# Altium PCB R Box - PCB v1.0 20210619.PcbDoc
Units mm, origin at the board's own origin, x right, y up, seen from the top; angles counter-clockwise.
Board outline 165 x 95 mm, 2 copper layers (Top Layer, Bottom Layer), stack 1.571 mm thick; 137 components, 23 nets, 221 pads, 295 vias.
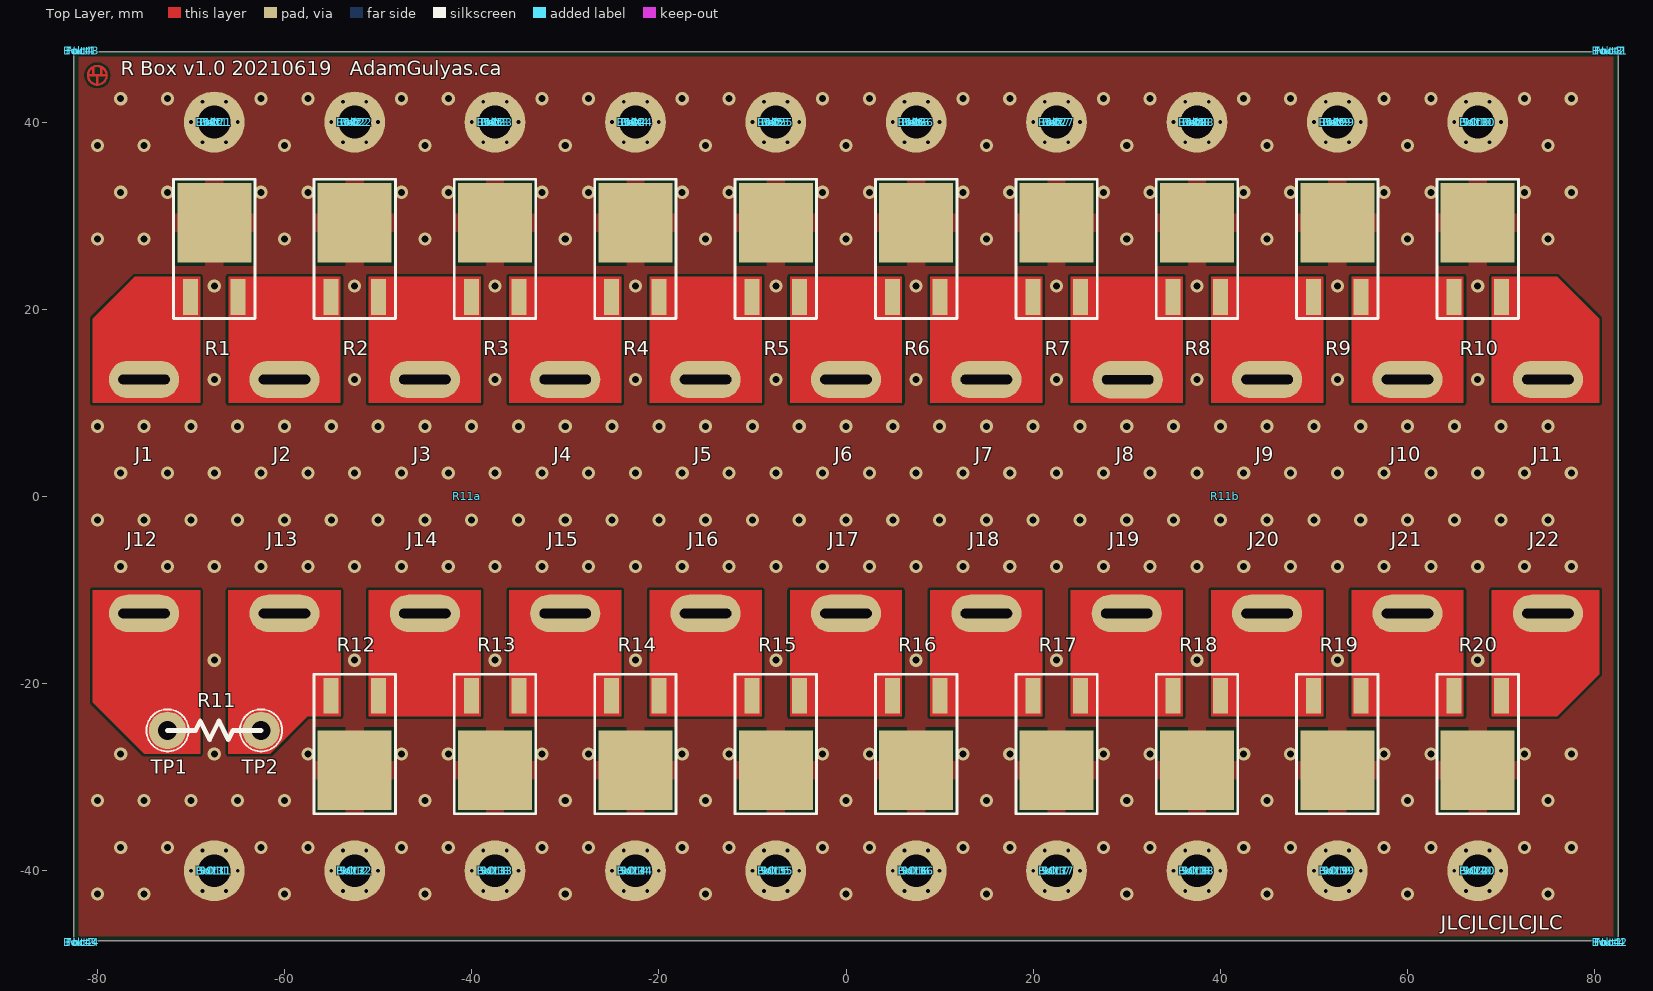
[diagram p0: Top Layer view]
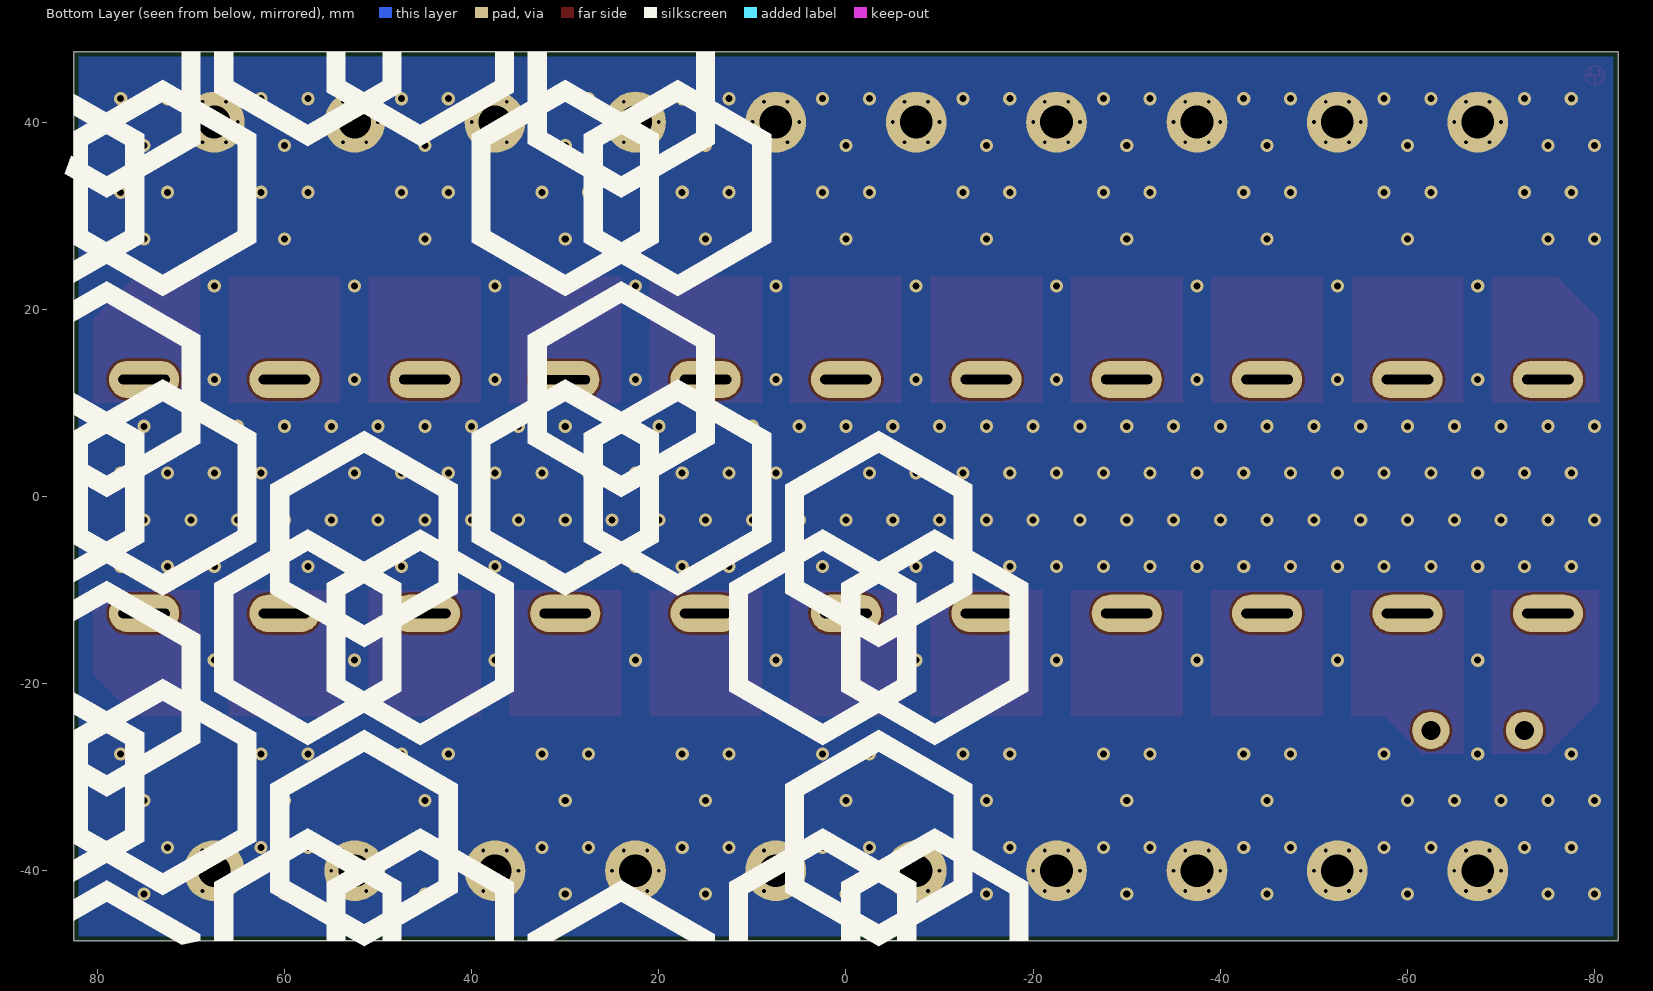
[diagram p1: Bottom Layer view, seen from below]

## Layer stack, top to bottom
Top Solder: solder mask 0.0102, Solder Resist, Dk 3.5
Top Layer: signal copper 0.0356
Dielectric 1: dielectric 1.5, FR-4, Dk 4.8
Bottom Layer: signal copper 0.0356
Bottom Solder: solder mask 0.0102, Solder Resist, Dk 3.5

## Board outline
-82.5,-47.5 -82.5,47.5 82.5,47.5 82.5,-47.5

## Design rules (kind name [scope] priority, off if disabled: settings)
Clearance [All] p1: gap=0.254 ignorepadtopadclearanceinfootprint=FALSE except(0: Arc-Hole Track-Hole SMDPad-Hole THPad-Hole Via-Hole Fill-Hole Poly-Hole Region-Hole Text-Hole)
ComponentClearance [All] p1 off: gap=0.254 collisioncheckmode=3 verticalgap=0.254 showdistances=FALSE
PolygonConnect [All] p1: thpad.connectstyle=Direct thpad.reliefconductorwidth=1 thpad.reliefentries=4 thpad.polygonreliefangle="45 Angle" thpad.airgapwidth=0.254 smdpad.connectstyle=Relief smdpad.reliefconductorwidth=2 smdpad.reliefentries=4 smdpad.polygonreliefangle="90 Angle" smdpad.airgapwidth=0.35 via.connectstyle=Direct via.reliefconductorwidth=1 via.reliefentries=4 via.polygonreliefangle="45 Angle" via.airgapwidth=0.254
RoutingVias [All] p1: holewidth=0.711 width=1.27 viastyle="Through Hole" minholewidth=0.711 minwidth=1.27 maxholewidth=0.711 maxwidth=1.27
SolderMaskExpansion [All] p1: expansion=0.102
Width [All] p1: maxlimit=0.254 minlimit=0.254 preferedwidth=0.254
29 further rules are at their usual default settings.

## Components (designator, comment, footprint, x,y, rotation, side; value= is the part's Value field where it differs from the comment)
Bolt1 "M3 6mm" "MECH - BOLT - M3 - 6MM" -67.5,40 r0 top
Bolt2 "M3 6mm" "MECH - BOLT - M3 - 6MM" -52.5,40 r0 top
Bolt3 "M3 6mm" "MECH - BOLT - M3 - 6MM" -37.5,40 r0 top
Bolt4 "M3 6mm" "MECH - BOLT - M3 - 6MM" -22.5,40 r0 top
Bolt5 "M3 6mm" "MECH - BOLT - M3 - 6MM" -7.5,40 r0 top
Bolt6 "M3 6mm" "MECH - BOLT - M3 - 6MM" 7.5,40 r0 top
Bolt7 "M3 6mm" "MECH - BOLT - M3 - 6MM" 22.5,40 r0 top
Bolt8 "M3 6mm" "MECH - BOLT - M3 - 6MM" 37.5,40 r0 top
Bolt9 "M3 6mm" "MECH - BOLT - M3 - 6MM" 52.5,40 r0 top
Bolt10 "M3 6mm" "MECH - BOLT - M3 - 6MM" 67.5,40 r0 top
Bolt11 "M3 6mm" "MECH - BOLT - M3 - 6MM" -67.5,-40 r0 top
Bolt12 "M3 6mm" "MECH - BOLT - M3 - 6MM" -52.5,-40 r0 top
Bolt13 "M3 6mm" "MECH - BOLT - M3 - 6MM" -37.5,-40 r0 top
Bolt14 "M3 6mm" "MECH - BOLT - M3 - 6MM" -22.5,-40 r0 top
Bolt15 "M3 6mm" "MECH - BOLT - M3 - 6MM" -7.5,-40 r0 top
Bolt16 "M3 6mm" "MECH - BOLT - M3 - 6MM" 7.5,-40 r0 top
Bolt17 "M3 6mm" "MECH - BOLT - M3 - 6MM" 22.5,-40 r0 top
Bolt18 "M3 6mm" "MECH - BOLT - M3 - 6MM" 37.5,-40 r0 top
Bolt19 "M3 6mm" "MECH - BOLT - M3 - 6MM" 52.5,-40 r0 top
Bolt20 "M3 6mm" "MECH - BOLT - M3 - 6MM" 67.5,-40 r90 top
Bolt21 "M3 6mm" "Mech - Bolt - M3 - 6mm - back" -67.5,40 r0 top
Bolt22 "M3 6mm" "Mech - Bolt - M3 - 6mm - back" -52.5,40 r90 top
Bolt23 "M3 6mm" "Mech - Bolt - M3 - 6mm - back" -37.5,40 r90 top
Bolt24 "M3 6mm" "Mech - Bolt - M3 - 6mm - back" -22.5,40 r90 top
Bolt25 "M3 6mm" "Mech - Bolt - M3 - 6mm - back" -7.5,40 r90 top
Bolt26 "M3 6mm" "Mech - Bolt - M3 - 6mm - back" 7.5,40 r90 top
Bolt27 "M3 6mm" "Mech - Bolt - M3 - 6mm - back" 22.5,40 r90 top
Bolt28 "M3 6mm" "Mech - Bolt - M3 - 6mm - back" 37.5,40 r90 top
Bolt29 "M3 6mm" "Mech - Bolt - M3 - 6mm - back" 52.5,40 r90 top
Bolt30 "M3 6mm" "Mech - Bolt - M3 - 6mm - back" 67.5,40 r90 top
Bolt31 "M3 6mm" "Mech - Bolt - M3 - 6mm - back" -67.5,-40 r0 top
Bolt32 "M3 6mm" "Mech - Bolt - M3 - 6mm - back" -52.5,-40 r90 top
Bolt33 "M3 6mm" "Mech - Bolt - M3 - 6mm - back" -37.5,-40 r90 top
Bolt34 "M3 6mm" "Mech - Bolt - M3 - 6mm - back" -22.5,-40 r90 top
Bolt35 "M3 6mm" "Mech - Bolt - M3 - 6mm - back" -7.5,-40 r90 top
Bolt36 "M3 6mm" "Mech - Bolt - M3 - 6mm - back" 7.5,-40 r90 top
Bolt37 "M3 6mm" "Mech - Bolt - M3 - 6mm - back" 22.5,-40 r90 top
Bolt38 "M3 6mm" "Mech - Bolt - M3 - 6mm - back" 37.5,-40 r90 top
Bolt39 "M3 6mm" "Mech - Bolt - M3 - 6mm - back" 52.5,-40 r90 top
Bolt40 "M3 6mm" "Mech - Bolt - M3 - 6mm - back" 67.5,-40 r90 top
Bolt41 "M3 8mm" "MECH - BOLT - M3 - 8MM" 81.65,47.65 r0 top
Bolt42 "M3 8mm" "MECH - BOLT - M3 - 8MM" 81.65,-47.65 r90 top
Bolt43 "M3 8mm" "MECH - BOLT - M3 - 8MM" -81.65,47.65 r90 top
Bolt44 "M3 8mm" "MECH - BOLT - M3 - 8MM" -81.65,-47.65 r90 top
Foot1 "720" "FEET - M3 - PN720" -81.65,47.65 r0 top
Foot2 "720" "FEET - M3 - PN720" 81.65,47.65 r0 top
Foot3 "720" "FEET - M3 - PN720" -81.65,-47.65 r0 top
Foot4 "720" "FEET - M3 - PN720" 81.65,-47.65 r0 top
J1 "Banana" "J - BANANA - 108-09XX SERIES" -75,12.5 r90 top
J2 "Banana" "J - BANANA - 108-09XX SERIES" -60,12.5 r90 top
J3 "Banana" "J - BANANA - 108-09XX SERIES" -45,12.5 r90 top
J4 "Banana" "J - BANANA - 108-09XX SERIES" -30,12.5 r90 top
J5 "Banana" "J - BANANA - 108-09XX SERIES" -15,12.5 r90 top
J6 "Banana" "J - BANANA - 108-09XX SERIES" 0,12.5 r90 top
J7 "Banana" "J - BANANA - 108-09XX SERIES" 15,12.5 r90 top
J8 "Banana" "J - BANANA - 108-09XX SERIES" 30.104,12.475 r90 top
J9 "Banana" "J - BANANA - 108-09XX SERIES" 45,12.5 r90 top
J10 "Banana" "J - BANANA - 108-09XX SERIES" 60,12.5 r90 top
J11 "Banana" "J - BANANA - 108-09XX SERIES" 75,12.5 r90 top
J12 "Banana" "J - BANANA - 108-09XX SERIES" -75,-12.5 r90 top
J13 "Banana" "J - BANANA - 108-09XX SERIES" -60,-12.5 r90 top
J14 "Banana" "J - BANANA - 108-09XX SERIES" -45,-12.5 r90 top
J15 "Banana" "J - BANANA - 108-09XX SERIES" -30,-12.5 r90 top
J16 "Banana" "J - BANANA - 108-09XX SERIES" -15,-12.5 r90 top
J17 "Banana" "J - BANANA - 108-09XX SERIES" 0,-12.5 r90 top
J18 "Banana" "J - BANANA - 108-09XX SERIES" 15,-12.5 r90 top
J19 "Banana" "J - BANANA - 108-09XX SERIES" 30,-12.5 r90 top
J20 "Banana" "J - BANANA - 108-09XX SERIES" 45,-12.5 r90 top
J21 "Banana" "J - BANANA - 108-09XX SERIES" 60,-12.5 r90 top
J22 "Banana" "J - BANANA - 108-09XX SERIES" 75,-12.5 r90 top
M1 "M3 MH" "Bolt Hole - M3" -67.5,40 r0 top
M2 "M3 MH" "Bolt Hole - M3" -52.5,40 r0 top
M3 "M3 MH" "Bolt Hole - M3" -37.5,40 r0 top
M4 "M3 MH" "Bolt Hole - M3" -22.5,40 r0 top
M5 "M3 MH" "Bolt Hole - M3" -7.5,40 r0 top
M6 "M3 MH" "Bolt Hole - M3" 7.5,40 r0 top
M7 "M3 MH" "Bolt Hole - M3" 22.5,40 r0 top
M8 "M3 MH" "Bolt Hole - M3" 37.5,40 r0 top
M9 "M3 MH" "Bolt Hole - M3" 52.5,40 r0 top
M10 "M3 MH" "Bolt Hole - M3" 67.5,40 r0 top
M11 "M3 MH" "Bolt Hole - M3" -67.5,-40 r0 top
M12 "M3 MH" "Bolt Hole - M3" -52.5,-40 r0 top
M13 "M3 MH" "Bolt Hole - M3" -37.5,-40 r0 top
M14 "M3 MH" "Bolt Hole - M3" -22.5,-40 r0 top
M15 "M3 MH" "Bolt Hole - M3" -7.5,-40 r0 top
M16 "M3 MH" "Bolt Hole - M3" 7.5,-40 r0 top
M17 "M3 MH" "Bolt Hole - M3" 22.5,-40 r0 top
M18 "M3 MH" "Bolt Hole - M3" 37.5,-40 r0 top
M19 "M3 MH" "Bolt Hole - M3" 52.5,-40 r0 top
M20 "M3 MH" "Bolt Hole - M3" 67.5,-40 r0 top
Nut1 "M3" "MECH - NUT - M3" 81.65,-47.65 r0 top
Nut2 "M3" "MECH - NUT - M3" -81.65,-47.65 r0 top
Nut3 "M3" "MECH - NUT - M3" 81.65,47.65 r0 top
Nut4 "M3" "MECH - NUT - M3" -81.65,47.65 r0 top
R1 "1Ω" "R - PWR163" -67.5,25 r0 top value=1O
R2 "1Ω" "R - PWR163" -52.5,25 r0 top value=1O
R3 "1Ω" "R - PWR163" -37.5,25 r0 top value=1O
R4 "1Ω" "R - PWR163" -22.5,25 r0 top value=1O
R5 "1Ω" "R - PWR163" -7.5,25 r0 top value=1O
R6 "1Ω" "R - PWR163" 7.5,25 r0 top value=1O
R7 "1Ω" "R - PWR163" 22.5,25 r0 top value=1O
R8 "1Ω" "R - PWR163" 37.5,25 r0 top value=1O
R9 "1Ω" "R - PWR163" 52.5,25 r0 top value=1O
R10 "1Ω" "R - PWR163" 67.5,25 r0 top value=1O
R11a "5Ω" "R - KAL50W" -40.5,0 r180 top value=5O
R11b "5Ω" "R - KAL50W" 40.5,0 r180 top value=5O
R12 "10Ω" "R - PWR163" -52.5,-25 r180 top value=10O
R13 "10Ω" "R - PWR163" -37.5,-25 r180 top value=10O
R14 "10Ω" "R - PWR163" -22.5,-25 r180 top value=10O
R15 "10Ω" "R - PWR163" -7.5,-25 r180 top value=10O
R16 "10Ω" "R - PWR163" 7.5,-25 r180 top value=10O
R17 "10Ω" "R - PWR163" 22.5,-25 r180 top value=10O
R18 "10Ω" "R - PWR163" 37.5,-25 r180 top value=10O
R19 "10Ω" "R - PWR163" 52.5,-25 r180 top value=10O
R20 "10Ω" "R - PWR163" 67.5,-25 r180 top value=10O
SO1 "M3 FF 12mm" "Mech - SO - M3 - FF - 12mm" -67.5,40 r0 top
SO2 "M3 FF 12mm" "Mech - SO - M3 - FF - 12mm" -52.5,40 r0 top
SO3 "M3 FF 12mm" "Mech - SO - M3 - FF - 12mm" -37.5,40 r0 top
SO4 "M3 FF 12mm" "Mech - SO - M3 - FF - 12mm" -22.5,40 r0 top
SO5 "M3 FF 12mm" "Mech - SO - M3 - FF - 12mm" -7.5,40 r0 top
SO6 "M3 FF 12mm" "Mech - SO - M3 - FF - 12mm" 7.5,40 r0 top
SO7 "M3 FF 12mm" "Mech - SO - M3 - FF - 12mm" 22.5,40 r0 top
SO8 "M3 FF 12mm" "Mech - SO - M3 - FF - 12mm" 37.5,40 r0 top
SO9 "M3 FF 12mm" "Mech - SO - M3 - FF - 12mm" 52.5,40 r0 top
SO10 "M3 FF 12mm" "Mech - SO - M3 - FF - 12mm" 67.5,40 r0 top
SO11 "M3 FF 12mm" "Mech - SO - M3 - FF - 12mm" -67.5,-40 r0 top
SO12 "M3 FF 12mm" "Mech - SO - M3 - FF - 12mm" -52.5,-40 r0 top
SO13 "M3 FF 12mm" "Mech - SO - M3 - FF - 12mm" -37.5,-40 r0 top
SO14 "M3 FF 12mm" "Mech - SO - M3 - FF - 12mm" -22.5,-40 r0 top
SO15 "M3 FF 12mm" "Mech - SO - M3 - FF - 12mm" -7.5,-40 r0 top
SO16 "M3 FF 12mm" "Mech - SO - M3 - FF - 12mm" 7.5,-40 r0 top
SO17 "M3 FF 12mm" "Mech - SO - M3 - FF - 12mm" 22.5,-40 r0 top
SO18 "M3 FF 12mm" "Mech - SO - M3 - FF - 12mm" 37.5,-40 r0 top
SO19 "M3 FF 12mm" "Mech - SO - M3 - FF - 12mm" 52.5,-40 r0 top
SO20 "M3 FF 12mm" "Mech - SO - M3 - FF - 12mm" 67.5,-40 r0 top
TP1 "Signal" "TP - TH - 4MM" -72.5,-25 r0 top
TP2 "Signal" "TP - TH - 4MM" -62.5,-25 r0 top

## Footprints (in the part's own frame and the unit in brackets; to place one, negate y for a bottom-side part, rotate by r counter-clockwise, add the part's x,y. Pads: shape width x height; smd on the part's side, far side on the other; paste and mask are expansions set on the pad)
"Bolt Hole - M3" [mm]
  round 0.8 hole 0.4 mask+0.05: 1(-2.5,0) 1(-1.25,-2.165) 1(-1.25,2.165) 1(1.25,-2.165) 1(1.25,2.165) 1(2.5,0)
  round 6.5 hole 3.5 mask+0.05: 1(0,0)
"FEET - M3 - PN720" [mm] "36-720-ND"
  body extent -6.35,-6.35 6.35,6.35
"J - BANANA - 108-09XX SERIES" [mm] "J153-ND"
  oval 4x7.5 hole 1 slot 5.5 at 90 deg: 1(0,0)
  body extent -6.42,-5.56 6.42,5.56, height 19.3
"MECH - BOLT - M3 - 6MM" [mm]
  body extent -3,-3 3,3, height 16.94
"Mech - Bolt - M3 - 6mm - back" [mm] "H743-ND"
  body extent -3,-3 3,3, height 6.4
"MECH - BOLT - M3 - 8MM" [mm] "H743-ND"
  body extent -3,-3 3,3
"MECH - NUT - M3" [mm]
  body extent -2.75,-3.18 2.75,3.18
"Mech - SO - M3 - FF - 12mm" [mm] "36-24434-ND"
  body extent -2.89,-2.5 2.89,2.5, height 12
"R - KAL50W" [mm]
  body extent -35.41,-14.48 35.4,14.48
"R - PWR163" [mm] "118-PWR163S-25-1R00FECT-ND"
  rect 7.9x8.5 smd: 0(0,4.25)
  rect 1.6x3.8 smd: 1(-2.54,-3.685) 2(2.54,-3.685)
  silkscreen extent -4.35,-6 4.35,8.9, body extent -4.06,-4.19 4.07,8.06, height 2.79
"TP - TH - 4MM" [mm]
  round 4 hole 2: 1(0,0)
  silkscreen extent -2.25,-2.25 2.25,2.25

## Part data
Bolt1 Bolt2 Bolt3 Bolt4 Bolt5 Bolt6 Bolt7 Bolt8 Bolt9 Bolt10 Bolt11 Bolt12 Bolt13 Bolt14 Bolt15 Bolt16 Bolt17 Bolt18 Bolt19 Bolt20 Bolt21 Bolt22 Bolt23 Bolt24 Bolt25 Bolt26 Bolt27 Bolt28 Bolt29 Bolt30 Bolt31 Bolt32 Bolt33 Bolt34 Bolt35 Bolt36 Bolt37 Bolt38 Bolt39 Bolt40: library part "Mech - Bolt - M3 - 6mm", "MACH SCREW PAN HEAD PHILLIPS M3", ComponentLink1Description=Datasheet, ComponentLink1URL=https://apmhexseal.com/wp-content/uploads/APMShortCatalog-HEX-SC-01-Rev.-06.19.19.pdf, ComponentLink2Description=Digi-Key, ComponentLink2URL=https://www.digikey.ca/en/products/detail/apm-hexseal/RM3X6MM-2701/612968, Digi-Key PN=335-1156-ND, MFG="APM Hexseal", MFG PN="RM3X6MM 2701"
Bolt41 Bolt42 Bolt43 Bolt44: library part "Mech - Bolt - M3 - 8mm", "MACH SCREW PAN HEAD PHILLIPS M3", ComponentLink1Description=Datasheet, ComponentLink1URL=http://www.fasnetdirect.com/refguide/MetD7985a.pdf, ComponentLink2Description=Digi-Key, ComponentLink2URL=https://www.digikey.ca/en/products/detail/b-f-fastener-supply/MPMS-003-0008-PH/274954, Digi-Key PN=H743-ND, MFG="B&F Fastener Supply", MFG PN="MPMS 003 0008 PH"
Foot1 Foot2 Foot3 Foot4: library part "Feet - M3 - 720", "BUMPER CYLINDRICAL 0.5\" DIA BLK", ComponentLink1Description=Datasheet, ComponentLink1URL=https://www.keyelco.com/userAssets/file/M65p134.pdf, ComponentLink2Description=Digi-Key, ComponentLink2URL=https://www.digikey.ca/en/products/detail/keystone-electronics/720/61956, Digi-Key PN=36-720-ND, Height=6.35mm, MFG="Keystone Electronics", MFG PN=720, Mounting Type=Bolt, Price/1 @10=$0.43
J1 J2 J3 J4 J5 J6 J7 J8 J9 J10 J11 J12 J13 J14 J15 J16 J17 J18 J19 J20 J21 J22: library part "Jack - Banana - 108-0904-001", "CONN BANANA JACK SLDR TABS GREEN", Current Rating (Amps)="15 ADC", Insulation Color=Green, Op Temp="-55°C ~ 85°C", ComponentLink1Description=Datasheet, ComponentLink1URL=https://belfuse.com/resources/drawings/cinchconnectivitysolutions/johnson/dr-ccs-john-108-0904-001.pdf, ComponentLink2Description=Digi-Key, ComponentLink2URL=https://www.digikey.ca/en/products/detail/cinch-connectivity-solutions-johnson/108-0904-001/5931, Digi-Key PN=J153-ND, MFG="Cinch Connectivity Solutions Johnson", MFG PN=108-0904-001, Mounting Type="Panel Mount", Price/1 @10=$1.099
M1 M2 M3 M4 M5 M6 M7 M8 M9 M10 M11 M12 M13 M14 M15 M16 M17 M18 M19 M20: library part "Mech - Bolt Hole - M3", "M3 Mounting Pad"
Nut1 Nut2 Nut3 Nut4: library part "Mech - Nut - M3", "HEX NUT 0.217\" STEEL M3", ComponentLink1Description=Datasheet, ComponentLink1URL=https://www.keyelco.com/userAssets/file/M65p135.pdf, ComponentLink2Description=Digi-Key, ComponentLink2URL=https://www.digikey.ca/en/products/detail/keystone-electronics/4708/4499301, Composition=Steel, Digi-Key PN=36-4708-ND, Height=2.39mm, MFG="Keystone Electronics", MFG PN=4708, Price/1 @10=$0.1572
R1 R2 R3 R4 R5 R6 R7 R8 R9 R10: library part "R - SMT - 1O - 25W", "RES SMD 1 OHM 1% 25W DPAK", Op Temp="-55°C ~ 155°C", Package="TO-252-3, DPak (2 Leads + Tab), SC-63", Power=25W, Temp Coeff=±100ppm/°C, Tolerance=±1%, ComponentLink1Description=Datasheet, ComponentLink1URL=https://www.bourns.com/docs/Product-Datasheets/PWR163.pdf, ComponentLink2Description=Digi-Key, ComponentLink2URL=https://www.digikey.ca/en/products/detail/bourns-inc/PWR163S-25-1R00FE/4699561, Composition="Thick Film", Digi-Key PN=118-PWR163S-25-1R00FECT-ND, Height=3.17mm, MFG="Bourns Inc.", MFG PN=PWR163S-25-1R00FE, Mounting Type=SMT, Price/1 @10=$4.59, Series=PWR163, Size="8.13mm L x 8.22mm W"
R11a R11b: library part "R - PWR - 5O", "RES CHAS MNT 5 OHM 1% 50W", Op Temp="-55°C ~ 275°C", Package="Axial, Box", Power=50W, Temp Coeff=±50ppm/°C, Tolerance=±1%, ComponentLink1Description=Datasheet, ComponentLink1URL=https://www.seielect.com/catalog/sei-kal.pdf, ComponentLink2Description=Digi-Key, ComponentLink2URL=https://www.digikey.ca/en/products/detail/stackpole-electronics-inc/KAL50FB5R00/1646198, Composition=Wirewound, Digi-Key PN=KAL50FB5R00-ND, Height=16.28mm, MFG="Stackpole Electronics Inc", MFG PN=KAL50FB5R00, Mounting Type="Chassis Mount", Price/1 @10=$4.232, Series=KAL
R12 R13 R14 R15 R16 R17 R18 R19 R20: library part "R - SMT - 10O - 25W", "RES SMD 10 OHM 1% 25W DPAK", Op Temp="-55°C ~ 155°C", Package="TO-252-3, DPak (2 Leads + Tab), SC-63", Power=25W, Temp Coeff=±100ppm/°C, Tolerance=±1%, ComponentLink1Description=Datasheet, ComponentLink1URL=https://www.bourns.com/docs/Product-Datasheets/PWR163.pdf, ComponentLink2Description=Digi-Key, ComponentLink2URL=https://www.digikey.ca/en/products/detail/bourns-inc/PWR163S-25-10R0F/2334147, Composition="Thick Film", Digi-Key PN=PWR163S-25-10R0F-ND, Height=3.17mm, MFG="Bourns Inc.", MFG PN=PWR163S-25-10R0F, Mounting Type=SMT, Price/1 @10=$3.581, Series=PWR163, Size="8.13mm L x 8.22mm W"
SO1 SO2 SO3 SO4 SO5 SO6 SO7 SO8 SO9 SO10 SO11 SO12 SO13 SO14 SO15 SO16 SO17 SO18 SO19 SO20: library part "Mech - SO - M3 - FF - 12mm", "HEX STANDOFF M3 ALUMINUM 12MM", ComponentLink1Description=Datasheet, ComponentLink1URL=https://www.keyelco.com/userAssets/file/M65p76.pdf, ComponentLink2Description=Digi-Key, ComponentLink2URL=https://www.digikey.ca/en/products/detail/keystone-electronics/24434/1532166, Digi-Key PN=36-24434-ND, MFG="Keystone Electronics", MFG PN=24434
TP1 TP2: library part "TP - TH - 4mm"

## Via types
v1: diameter 1.4, hole 0.75, Top Layer to Bottom Layer, tented both sides, 295 vias

## Nets (pads, with @x,y where several pads share a name; then routed paths per layer and width w, separated by ;. In a path a pad name is that pad's centre, name@x,y a point inside that pad or via, vN(x,y) a via of type N, cw(c..) or ccw(c..) an arc to the next point about the centre after c; other vN are vias at no path point)
GND: M1.1 M2.1 M3.1 M4.1 M5.1 M6.1 M7.1 M8.1 M9.1 M10.1 M11.1 M12.1 M13.1 M14.1 M15.1 M16.1 M17.1 M18.1 M19.1 M20.1 R1.0 R2.0 R3.0 R4.0 R5.0 R6.0 R7.0 R8.0 R9.0 R10.0 R12.0 R13.0 R14.0 R15.0 R16.0 R17.0 R18.0 R19.0 R20.0
  other v1: -80,-42.5 -75,-42.5 -60,-42.5 -45,-42.5 -30,-42.5 -15,-42.5 0,-42.5 15,-42.5 30,-42.5 45,-42.5 60,-42.5 75,-42.5 -77.5,-37.5 -72.5,-37.5 -62.5,-37.5 -57.5,-37.5 -47.5,-37.5 -42.5,-37.5 -32.5,-37.5 -27.5,-37.5 -17.5,-37.5 -12.5,-37.5 -2.5,-37.5 2.5,-37.5 12.5,-37.5 17.5,-37.5 27.5,-37.5 32.5,-37.5 42.5,-37.5 47.5,-37.5 57.5,-37.5 62.5,-37.5 72.5,-37.5 77.5,-37.5 -80,-32.5 -75,-32.5 -70,-32.5 -65,-32.5 -60,-32.5 -45,-32.5 -30,-32.5 -15,-32.5 0,-32.5 15,-32.5 30,-32.5 45,-32.5 60,-32.5 75,-32.5 -77.5,-27.5 -67.5,-27.5 -57.5,-27.5 -47.5,-27.5 -42.5,-27.5 -32.5,-27.5 -27.5,-27.5 -17.5,-27.5 -12.5,-27.5 -2.5,-27.5 2.5,-27.5 12.5,-27.5 17.5,-27.5 27.5,-27.5 32.5,-27.5 42.5,-27.5 47.5,-27.5 57.5,-27.5 62.5,-27.5 72.5,-27.5 77.5,-27.5 -67.5,-17.5 -52.5,-17.5 -37.5,-17.5 -22.5,-17.5 -7.5,-17.5 7.5,-17.5 22.5,-17.5 37.5,-17.5 52.5,-17.5 67.5,-17.5 -77.5,-7.5 -72.5,-7.5 -67.5,-7.5 -62.5,-7.5 -57.5,-7.5 -52.5,-7.5 -47.5,-7.5 -42.5,-7.5 -37.5,-7.5 -32.5,-7.5 -27.5,-7.5 -22.5,-7.5 -17.5,-7.5 -12.5,-7.5 -7.5,-7.5 -2.5,-7.5 2.5,-7.5 7.5,-7.5 12.5,-7.5 17.5,-7.5 22.5,-7.5 27.5,-7.5 32.5,-7.5 37.5,-7.5 42.5,-7.5 47.5,-7.5 52.5,-7.5 57.5,-7.5 62.5,-7.5 67.5,-7.5 72.5,-7.5 77.5,-7.5 -80,-2.5 -75,-2.5 -70,-2.5 -65,-2.5 -60,-2.5 -55,-2.5 -50,-2.5 -45,-2.5 -40,-2.5 -35,-2.5 -30,-2.5 -25,-2.5 -20,-2.5 -15,-2.5 -10,-2.5 -5,-2.5 0,-2.5 5,-2.5 10,-2.5 15,-2.5 20,-2.5 25,-2.5 30,-2.5 35,-2.5 40,-2.5 45,-2.5 50,-2.5 55,-2.5 60,-2.5 65,-2.5 70,-2.5 75,-2.5 -77.5,2.5 -72.5,2.5 -67.5,2.5 -62.5,2.5 -57.5,2.5 -52.5,2.5 -47.5,2.5 -42.5,2.5 -37.5,2.5 -32.5,2.5 -27.5,2.5 -22.5,2.5 -17.5,2.5 -12.5,2.5 -7.5,2.5 -2.5,2.5 2.5,2.5 7.5,2.5 12.5,2.5 17.5,2.5 22.5,2.5 27.5,2.5 32.5,2.5 37.5,2.5 42.5,2.5 47.5,2.5 52.5,2.5 57.5,2.5 62.5,2.5 67.5,2.5 72.5,2.5 77.5,2.5 -80,7.5 -75,7.5 -70,7.5 -65,7.5 -60,7.5 -55,7.5 -50,7.5 -45,7.5 -40,7.5 -35,7.5 -30,7.5 -25,7.5 -20,7.5 -15,7.5 -10,7.5 -5,7.5 0,7.5 5,7.5 10,7.5 15,7.5 20,7.5 25,7.5 30,7.5 35,7.5 40,7.5 45,7.5 50,7.5 55,7.5 60,7.5 65,7.5 70,7.5 75,7.5 -67.5,12.5 -52.5,12.5 -37.5,12.5 -22.5,12.5 -7.5,12.5 7.5,12.5 22.5,12.5 37.5,12.5 52.5,12.5 67.5,12.5 -67.5,22.5 -52.5,22.5 -37.5,22.5 -22.5,22.5 -7.5,22.5 7.5,22.5 22.5,22.5 37.5,22.5 52.5,22.5 67.5,22.5 -80,27.5 -75,27.5 -60,27.5 -45,27.5 -30,27.5 -15,27.5 0,27.5 15,27.5 30,27.5 45,27.5 60,27.5 75,27.5 -77.5,32.5 -72.5,32.5 -62.5,32.5 -57.5,32.5 -47.5,32.5 -42.5,32.5 -32.5,32.5 -27.5,32.5 -17.5,32.5 -12.5,32.5 -2.5,32.5 2.5,32.5 12.5,32.5 17.5,32.5 27.5,32.5 32.5,32.5 42.5,32.5 47.5,32.5 57.5,32.5 62.5,32.5 72.5,32.5 77.5,32.5 -80,37.5 -75,37.5 -60,37.5 -45,37.5 -30,37.5 -15,37.5 0,37.5 15,37.5 30,37.5 45,37.5 60,37.5 75,37.5 -77.5,42.5 -72.5,42.5 -62.5,42.5 -57.5,42.5 -47.5,42.5 -42.5,42.5 -32.5,42.5 -27.5,42.5 -17.5,42.5 -12.5,42.5 -2.5,42.5 2.5,42.5 12.5,42.5 17.5,42.5 27.5,42.5 32.5,42.5 42.5,42.5 47.5,42.5 57.5,42.5 62.5,42.5 72.5,42.5 77.5,42.5
NetJ1_1: J1.1 R1.1
NetJ2_1: J2.1 R1.2 R2.1
NetJ3_1: J3.1 R2.2 R3.1
NetJ4_1: J4.1 R3.2 R4.1
NetJ5_1: J5.1 R4.2 R5.1
NetJ6_1: J6.1 R5.2 R6.1
NetJ7_1: J7.1 R6.2 R7.1
NetJ8_1: J8.1 R7.2 R8.1
NetJ9_1: J9.1 R8.2 R9.1
NetJ10_1: J10.1 R9.2 R10.1
NetJ11_1: J11.1 R10.2
NetJ12_1: J12.1 TP1.1
NetJ13_1: J13.1 R12.2 TP2.1
NetJ14_1: J14.1 R12.1 R13.2
NetJ15_1: J15.1 R13.1 R14.2
NetJ16_1: J16.1 R14.1 R15.2
NetJ17_1: J17.1 R15.1 R16.2
NetJ18_1: J18.1 R16.1 R17.2
NetJ19_1: J19.1 R17.1 R18.2
NetJ20_1: J20.1 R18.1 R19.2
NetJ21_1: J21.1 R19.1 R20.2
NetJ22_1: J22.1 R20.1
copper on no net: | length 11
  Top Layer w0.254: -81,45 -79,45 ; -80.425,45 -80.425,45.85 ; -80,44 -80,45 ; -79.575,45.025 -79.575,45.85 ; -79,45 ccw(c-80,45) -79,45

## Polygon pours and split planes (outlines as drawn)
GND on Top Layer "GND_L01_P001" (solid, pour order 1): -82,-47 82,-47 82,47 -82,47
GND on Bottom Layer "GND_L02_P002" (solid, pour order 2): -82,-47 82,-47 82,47 -82,47

## Other copper
Top Layer:
  rectangle net NetJ14_1: -51,-23.5 -39,-10
  rectangle net NetJ15_1: -36,-23.5 -24,-10
  rectangle net NetJ19_1: 24,-23.5 36,-10
  rectangle net NetJ20_1: 39,-23.5 51,-10
  rectangle net NetJ21_1: 54,-23.5 66,-10
  rectangle net NetJ10_1: 54,10 66,23.5
  rectangle net NetJ9_1: 39,10 51,23.5
  rectangle net NetJ8_1: 24,10 36,23.5
  rectangle net NetJ4_1: -36,10 -24,23.5
  rectangle net NetJ3_1: -51,10 -39,23.5
  rectangle net NetJ2_1: -66,10 -54,23.5
  rectangle net NetJ5_1: -21,10 -9,23.5
  rectangle net NetJ6_1: -6,10 6,23.5
  rectangle net NetJ7_1: 9,10 21,23.5
  rectangle net NetJ18_1: 9,-23.5 21,-10
  rectangle net NetJ17_1: -6,-23.5 6,-10
  rectangle net NetJ16_1: -21,-23.5 -9,-10
  region net NetJ13_1: -66,-10 -54,-10 -54,-23.5 -57.5,-23.5 -61.5,-27.5 -66,-27.5
  region net NetJ11_1: 69,23.5 69,10 80.5,10 80.5,19 76,23.5
  region net NetJ22_1: 69,-23.5 69,-10 80.5,-10 80.5,-19 76,-23.5
  region net NetJ12_1: -69,-27.5 -69,-10 -80.5,-10 -80.5,-22 -75,-27.5
  region net NetJ1_1: -69,23.5 -69,10 -80.5,10 -80.5,19 -76,23.5

## Silkscreen, mask and mechanical layers (free items; w line width, h text height)
Top Overlay:
  lines w0.5: -72.5,-25 -69.5,-25 -69,-24 -68,-26 -67,-24 -66,-26 -65.5,-25 -62.5,-25
  text "R Box v1.0 20210619   AdamGulyas.ca" at -77.5,45 h1.52
  text "R11" at -69.342,-22.5 h1.52
  text "JLCJLCJLCJLC" at 63.55,-46.3 h1.52
Bottom Overlay:
  drawing of 31 lines, arcs and shapes, not listed
Mechanical 1:
  the board outline again, w0.5
Mechanical 3:
  circle w3: c0,0 r131.8
Drill Drawing:
  lines w0.254: -80.791,-72.412 -79.097,-72.412 -79.944,-74.105 -80.791,-72.412 ; -80.791,-70.295 -79.944,-69.872 -79.097,-70.295 -79.521,-69.448 -79.097,-68.602 -79.944,-69.025 -80.791,-68.602 -80.367,-69.448 -80.791,-70.295 ; -80.791,-66.062 -80.367,-66.062 -80.367,-66.485 -79.521,-66.485 -79.521,-66.062 -79.097,-66.062 -79.097,-65.215 -79.521,-65.215 -79.521,-64.792 -80.367,-64.792 -80.367,-65.215 -80.791,-65.215 -80.791,-66.062 ; -80.791,-62.675 -80.791,-62.252 -80.367,-61.828 -80.791,-61.405 -80.791,-60.982 -80.367,-60.982 -79.944,-61.405 -79.521,-60.982 -79.097,-60.982 -79.097,-61.405 -79.521,-61.828 -79.097,-62.252 -79.097,-62.675 -79.521,-62.675 -79.944,-62.252 -80.367,-62.675 -80.791,-62.675 ; -80.791,-58.865 -79.097,-58.865 -79.097,-57.172 -80.791,-57.172 -80.791,-58.865
  lines w0.381: -82.31,-75.248 69.339,-75.248 ; -82.31,-56.198 69.339,-56.198 ; -68.317,-79.058 -68.317,-52.388 ; -53.081,-79.058 -53.081,-52.388 ; -34.747,-79.058 -34.747,-52.388 ; -21.898,-79.058 -21.898,-52.388 ; -3.26,-79.058 -3.26,-52.388 ; 11.723,-79.058 11.723,-52.388 ; 33.713,-79.058 33.713,-52.388 ; -82.31,-79.058 69.339,-79.058 69.339,-52.388 -82.31,-52.388 -82.31,-79.058
  text "Symbol" at -80.024,-55.055 h1.83
  text "Count" at -67.174,-55.055 h1.83
  text "Hole Size" at -51.938,-55.055 h1.83
  text "Plated" at -33.604,-55.055 h1.83
  text "Hole Type" at -20.755,-55.055 h1.83
  text "Via/Pad" at -2.117,-55.055 h1.83
  text "Hole Length" at 12.866,-55.055 h1.83
  text "Routed Path Length" at 34.856,-55.055 h1.83
  text "120" at -67.174,-58.865 h1.52
  text "0.400mm" at -51.938,-58.865 h1.52
  text "PTH" at -33.604,-58.865 h1.52
  text "Round" at -20.755,-58.865 h1.52
  text "Pad" at -2.117,-58.865 h1.52
  text "-" at 12.866,-58.865 h1.52
  text "-" at 34.856,-58.865 h1.52
  text "295" at -67.174,-62.675 h1.52
  text "0.750mm" at -51.938,-62.675 h1.52
  text "PTH" at -33.604,-62.675 h1.52
  text "Round" at -20.755,-62.675 h1.52
  text "Via" at -2.117,-62.675 h1.52
  text "-" at 12.866,-62.675 h1.52
  text "-" at 34.856,-62.675 h1.52
  text "22" at -67.174,-66.485 h1.52
  text "1.000mm" at -51.938,-66.485 h1.52
  text "PTH" at -33.604,-66.485 h1.52
  text "Slot" at -20.755,-66.485 h1.52
  text "Pad" at -2.117,-66.485 h1.52
  text "5.500mm" at 12.866,-66.485 h1.52
  text "4.500mm" at 34.856,-66.485 h1.52
  text "2" at -67.174,-70.295 h1.52
  text "2.000mm" at -51.938,-70.295 h1.52
  text "PTH" at -33.604,-70.295 h1.52
  text "Round" at -20.755,-70.295 h1.52
  text "Pad" at -2.117,-70.295 h1.52
  text "-" at 12.866,-70.295 h1.52
  text "-" at 34.856,-70.295 h1.52
  text "20" at -67.174,-74.105 h1.52
  text "3.500mm" at -51.938,-74.105 h1.52
  text "PTH" at -33.604,-74.105 h1.52
  text "Round" at -20.755,-74.105 h1.52
  text "Pad" at -2.117,-74.105 h1.52
  text "-" at 12.866,-74.105 h1.52
  text "-" at 34.856,-74.105 h1.52
  text "459 Total" at -67.174,-77.915 h1.52
  text "Slot definitions :" at -80.024,-81.597 h1.52
  text "Routed Path Length" at -53.793,-81.597 h1.52
  text "= Calculated from tool start centre position to tool end centre position." at -25.785,-81.597 h1.52
  text "Hole Length" at -53.793,-84.137 h1.52
  text "= Routed Path Length + Tool Size = Slot length as defined in the PCB layout" at -36.196,-84.137 h1.52

## Dimensions
-82.5,47.5 to -82.5,-47.5 on Mechanical 2
-82.5,47.5 to 82.5,47.5 on Mechanical 2